# Altium PCB SON_versept2017.PcbDoc
Units mil, origin at the board's own origin, x right, y up, seen from the top; angles counter-clockwise.
Board outline 6000 x 4000 mil, 2 copper layers (Top Layer, Bottom Layer); 46 components, 25 nets, 140 pads, 33 vias.
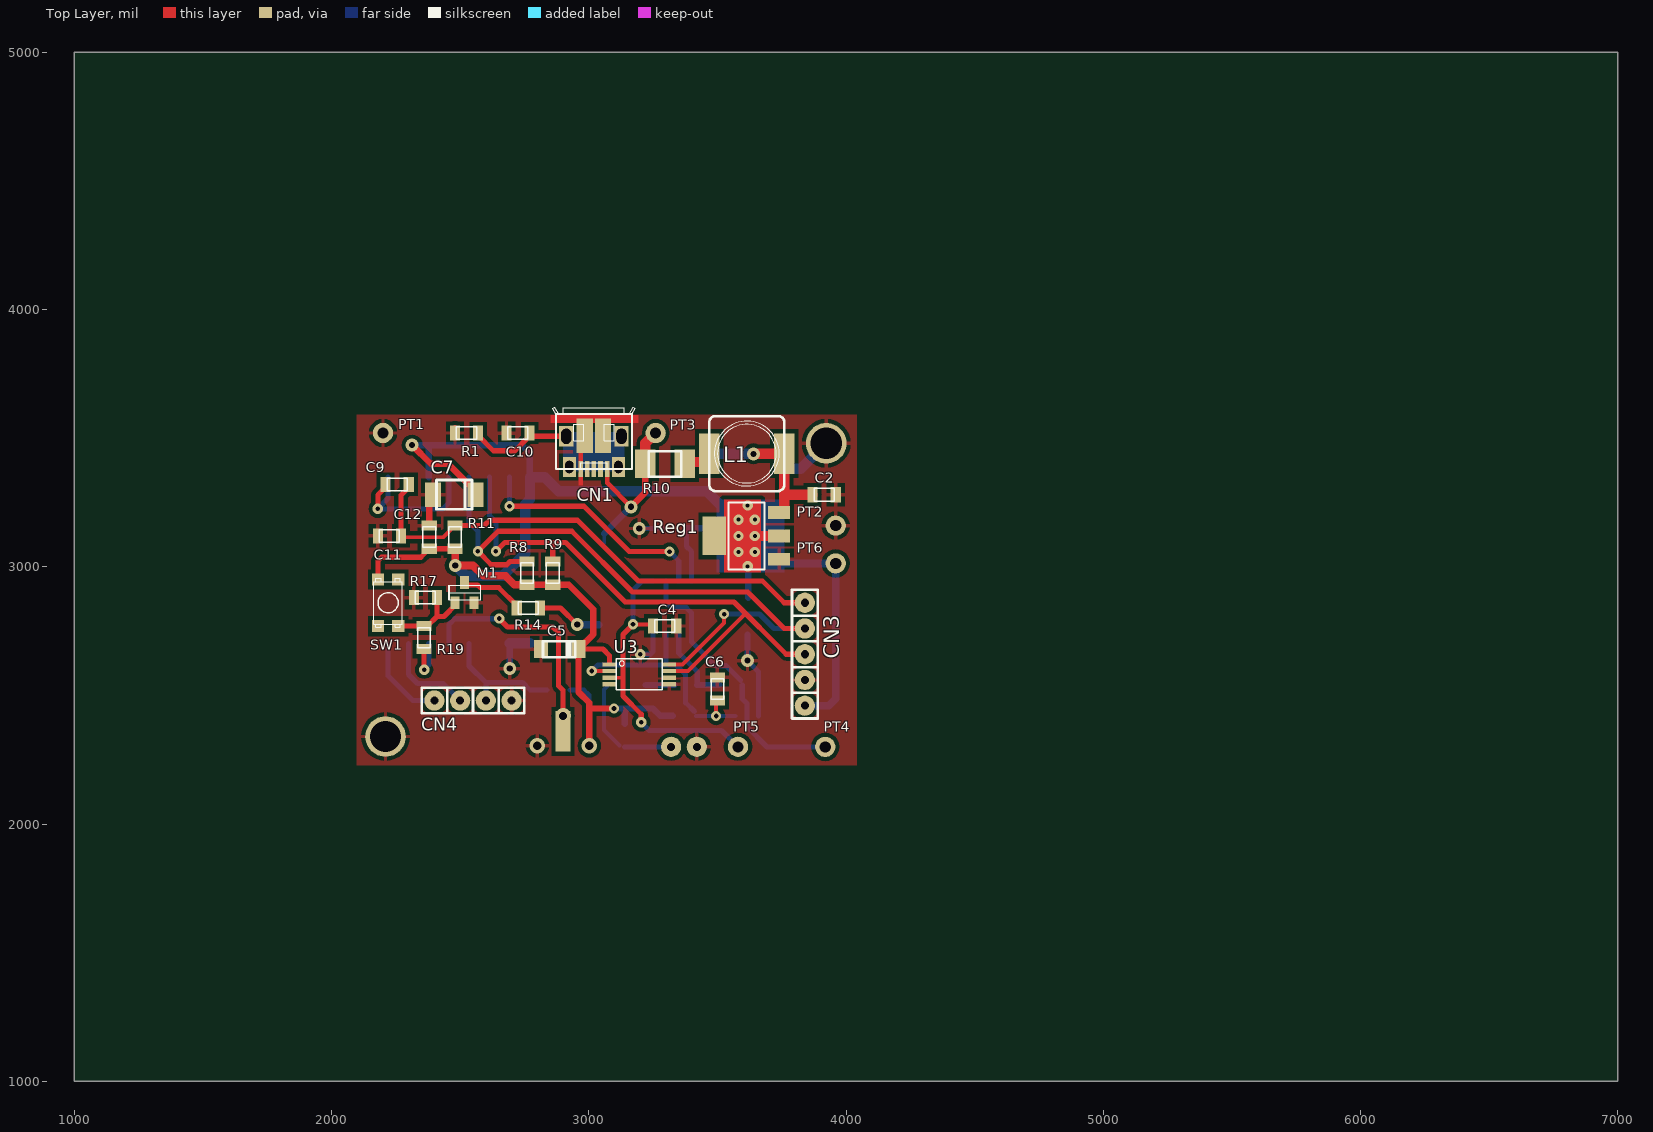
[diagram p0: Top Layer view]
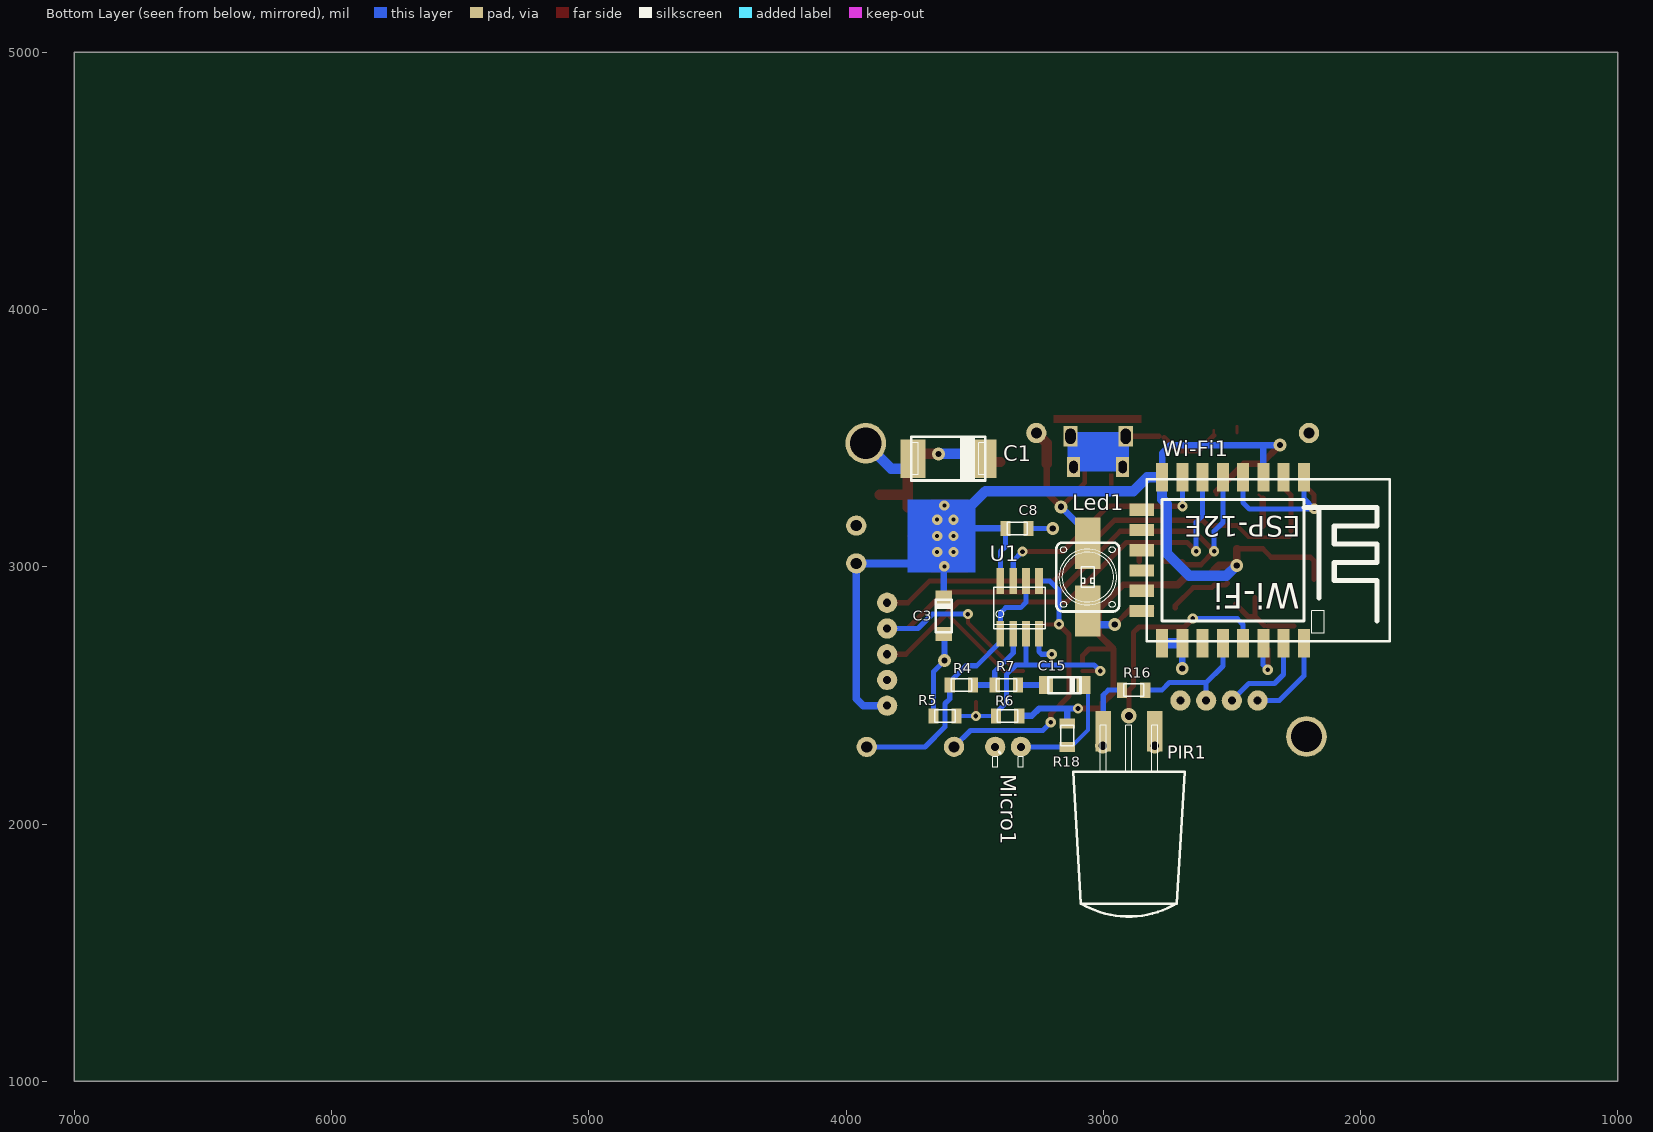
[diagram p1: Bottom Layer view, seen from below]

## Layer stack, top to bottom
Top Layer: signal copper 1.4
Dielectric: dielectric 12.6, FR-4, Dk 4.8
Bottom Layer: signal copper 1.4

## Board outline
1000,1000 7000,1000 7000,5000 1000,5000

## Design rules (kind name [scope] priority, off if disabled: settings)
AssemblyTestPointUsage [All] p1 off:
AssemblyTestpoint [All] p1 off: testpointundercomponent=TRUE minsize=40 maxsize=100 preferedsize=60 minholesize=0 maxholesize=40 preferedholesize=32 testpointgrid=1 usegrid=TRUE gridtolerance=0.01 allowsidetop=TRUE allowsidebottom=TRUE
Clearance [All] p1 off: gap=8
ComponentClearance [All] p1 off: gap=10 collisioncheckmode=3 verticalgap=10 showdistances=FALSE
DiffPairsRouting [All] p1 off: maxlimit=10 minlimit=10 mostfreqgap=10 maxuncoupledlength=500
FabricationTestPointUsage [All] p1 off: valid=0 allowmultiple=FALSE
FabricationTestpoint [All] p1 off: side=3 testpointundercomponent=TRUE minsize=40 maxsize=100 preferedsize=60 minholesize=0 maxholesize=40 preferedholesize=32 testpointgrid=1 allowsidetop=TRUE allowsidebottom=TRUE usegrid=TRUE gridtolerance=0.01
FanoutControl Fanout_BGA [IsBGA] p1 off: bgadir=Out bgaviamode=Centered fanoutstyle=Auto fanoutdirection=Alternating viagrid=1 // Fanout_BGA (Default Rule)
FanoutControl Fanout_LCC [IsLCC] p2 off: bgadir=Out bgaviamode=Centered fanoutstyle=Auto fanoutdirection=Alternating viagrid=1 // Fanout_LCC (Default Rule)
FanoutControl Fanout_SOIC [IsSOIC] p3 off: bgadir=Out bgaviamode=Centered fanoutstyle=Auto fanoutdirection=Alternating viagrid=1 // Fanout_SOIC (Default Rule)
FanoutControl Fanout_Small [(CompPinCount < 5)] p4 off: bgadir=Out bgaviamode=Centered fanoutstyle=Auto fanoutdirection=OutThenIn viagrid=1 // Fanout_Small (Default Rule)
FanoutControl Fanout_Default [All] p5 off: bgadir=Out bgaviamode=Centered fanoutstyle=Auto fanoutdirection=Alternating viagrid=1 // Fanout_Default (Default Rule)
Height [All] p1 off: minheight=0 maxheight=1000 prefheight=500
HoleSize [All] p1 off: absolutevalues=TRUE maxlimit=100 minlimit=1 maxpercent=80.000 minpercent=20.000
HoleToHoleClearance [All] p1 off: gap=10 allowstackedmicrovias=TRUE
PolygonConnect [All] p1: connectstyle=Relief reliefconductorwidth=15 reliefentries=4 polygonreliefangle="90 Angle"
RoomDefinition SON_versept2017 [InComponentClass('SON_versept2017')] p1: confinementstyle=ConfineIn formatcopy=TRUE lockcomponents=FALSE outline 1836,1593 4056,1593 4056,3663 1836,3663
RoutingVias [All] p1: holewidth=28 width=50 viastyle="Through Hole" minholewidth=28 minwidth=50 maxholewidth=28 maxwidth=50
SilkscreenOverComponentPads [All] p1: minsilkscreentomaskgap=10
SolderMaskExpansion [All] p1: expansion=4
Width [All] p1: maxlimit=80 minlimit=10 preferedwidth=10
13 further rules are at their usual default settings.

## Components (designator, comment, footprint, x,y, rotation, side; value= is the part's Value field where it differs from the comment)
C1 "220µF/16V" 7343-31 3720,3420 r180 bottom
C2 "100n" 0805 3960,3280 r180 top
C3 "10µF/16V" "Tantale 10µF/16V" 3620,2880 r90 bottom
C4 "100n" 0805 3340,2770 r180 top
C5 "10µF/6V3 tantale" "Tantale 10µF/6V3" 2960,2680 r180 top
C6 "10n" 0805 3500,2480 r90 top
C7 "47µF/10V tantale" "tantale 47µF/10V" 2560,3280 r180 top
C8 "100n" 0805 3290,3149 r0 bottom
C9 "100n" 0805 2300,3320 r180 top
C10 "100 n" 0805 2680,3520 r0 top
C11 "100n" 0805 2180,3120 r0 top
C12 "100n" 0805 2380,3160 r270 top
C15 "1µF/16V" 3216-18 3076.68,2540.32 r0 bottom
CN1 "USB Micro B" "USB Micro 714-2347" 3020,3380 r180 top
CN3 "inch_ligne 1x5" INCH_1x5_droit 3840,2460 r90 top
CN4 "inch_ligne 1x4" INCH_1x4_droit 2400,2480 r0 top
L1 "100µH CD74R series" "SELF CD74R" 3760,3440 r0 top
Led1 "LTW5AM" LTW5AM 3060,2960 r270 bottom
M1 "NTR4501N" "SOT23 (NTR4501)" 2480,2860 r0 top
Micro1 "Electret" "Micro_electret simple" 3320,2300 r180 bottom
PIR1 "PIR_WL" PIR_WL 3000,2360 r180 bottom
PT1 "GND" "PTEST boucle"#1 2200,3520 r0 top
PT2 "GND" "PTEST boucle"#1 3960,3160 r0 top
PT3 "+5V" "PTEST boucle"#1 3260,3520 r0 top
PT4 "Son" "PTEST boucle"#2 3920,2300 r0 top
PT5 "Seuil" "PTEST boucle"#1 3580,2300 r0 top
PT6 "+3V3" "PTEST boucle"#3 3960,3020 r0 top
R1 "100K" 0805 2480,3520 r0 top
R4 "100K" 0805 3506.68,2540.32 r0 bottom
R5 "10K" 0805 3660,2420 r180 bottom
R6 "10K" 0805 3416.68,2420.32 r180 bottom
R7 "1K" 0805 3331.68,2540.32 r0 bottom
R8 "10K" 0805 2760,3020 r270 top
R9 "10K" 0805 2860,3020 r270 top
R10 "0R33" 1210 3220,3400 r0 top
R11 "4K7" 0805 2480,3160 r270 top
R14 "68" 0805 2720,2840 r0 top
R16 "10K" 0805 2836.68,2520.32 r0 bottom
R17 "15K" 0805 2320,2880 r0 top
R18 "2K" 0805 3140,2300 r90 bottom
R19 "470" 0805 2360,2680 r90 top
Reg1 "LM1117/33" "SOT-223 thermo1" 3740,3120 r90 top
SW1 "KMR 4" "µSwitch KMR4" 2220,2860 r90 top
U1 "AD8052" SOIC08 3400,2740 r90 bottom
U3 "MCP47FEB21" TSSOP_8 3080,2620 r0 top
Wi-Fi1 "ESP-12E" ESP-12E 2220,3340 r270 bottom

## Footprints (in the part's own frame and the unit in brackets; to place one, negate y for a bottom-side part, rotate by r counter-clockwise, add the part's x,y. Pads: shape width x height; smd on the part's side, far side on the other; paste and mask are expansions set on the pad)
0805 [mm] "résistance CMS"
  rect 1x1.5 smd: 1(0,0) 2(2.286,0)
  silkscreen extent 0.13,-0.63 2.13,0.63
1210 [mm] "résistance CMS 0,5W ERJ14B"
  rect 2x2.8 smd: 1(0,0) 2(3.9,0)
  silkscreen extent 0.33,-1.26 3.53,1.24
3216-18 [mm] "condensateur tantale CMS (3,2 x 1,6 x 1,6)"
  rect 1.4x1.8 smd: 1(0,0) 2(3.7,0)
  silkscreen extent 0.3,-0.79 3.5,0.81
7343-31 [mm] "condensateur tantale CMS (7,3 x 4,3 x 3,0)"
  rect 2.5x3.8 smd: 1(6.5,0) 2(-0.5,0)
  silkscreen extent -0.65,-2.15 6.65,2.15
ESP-12E [mm] "module Wi-Fi"
  rect 2.8x1.2 smd: 1(-0.2,0) 2(-0.2,-2) 3(-0.2,-4) 4(-0.2,-6) 5(-0.2,-8) 6(-0.2,-10) 7(-0.2,-12) 8(-0.2,-14) 15(16.2,-14) 16(16.2,-12) 17(16.2,-10) 18(16.2,-8) 19(16.2,-6) 20(16.2,-4) 21(16.2,-2) 22(16.2,0)
  rect 1.2x2.4 smd: 9(3,-16) 10(5,-16) 11(7,-16) 12(9,-16) 13(11,-16) 14(13,-16)
  silkscreen extent 0,-15.5 16,8.5
INCH_1x4_droit [mm] "simple rangée 2,54 mm"
  round 2 hole 0.8: 1(0,0) 2(2.54,0) 3(5.08,0) 4(7.62,0)
  silkscreen extent -1.27,-1.27 8.89,1.27
INCH_1x5_droit [mm] "simple rangée 2,54 mm"
  round 2 hole 0.8: 1(0,0) 2(2.54,0) 3(5.08,0) 4(7.62,0) 5(10.16,0)
  silkscreen extent -1.27,-1.27 11.43,1.27
LTW5AM [mil] "LED golden dragon"
  rect 200x100 smd: 1(-132,0) 2(132,0)
  silkscreen extent -134,-122 134,122
"Micro_electret simple" [mm] "Microphone coudé sur PCB sans sérigraphie"
  round 2 hole 0.8: 0(-2.54,0) 1(0,0)
  silkscreen extent -2.79,-2 0.25,-0.51
PIR_WL [mm] "détecteur infrarouge"
  rect 1.5x4 smd: 1(0,0) 3(5.08,0)
  rect 1.5x4 smd far side: 2(2.54,0)
  silkscreen extent -2.96,-18.28 8.04,0.6
"PTEST boucle"#1 [mm] "RS 262-2179"
  round 2 hole 1.1: 1(0,0)
"PTEST boucle"#2 [mm] "RS 262-2179"
  round 2 hole 1.1: 1(-0.017,-0.008)
"PTEST boucle"#3 [mm] "RS 262-2179"
  round 2 hole 1.1: 1(0,-0.178)
"SELF CD74R" [mm] "Self 7,4 x 7,4"
  rect 2x4 smd: 1(0,0) 2(-7.4,0)
  silkscreen extent -7.4,-3.7 0,3.7
SOIC08 [mil]
  rect 100x30 smd: 1(0,0) 2(0,-50) 3(0,-100) 4(0,-150) 5(205,-150) 6(205,-100) 7(205,-50) 8(205,0)
  silkscreen extent 20,-175 181,25
"SOT23 (NTR4501)" [mil] "D->1 G->2 S->3"
  rect 35x50 smd: 1(37.4,78.74) 2(0,0) 3(74.8,0)
  silkscreen extent -25,12 100,68
"SOT-223 thermo1" [mm] "empreinte pour SOT-223"
  rect 1.27x2.15 smd: 1(-2.3,0) 2(0,0) 3(2.3,0)
  rect 3.81x2.286 smd: 2(0,6.4)
  Top Layer region: -3.6,1.8 3.6,1.8 3.6,5.461 -3.6,5.461
  Bottom Layer region: -3.602,-0.531 3.598,-0.531 3.598,6.175 -3.602,6.175
  silkscreen extent -3.3,1.45 3.3,5
"Tantale 10µF/6V3" [mm] "1206 ou 3216-18 (175-4041)"
  rect 1.4x1.8 smd: 1(0,0) 2(3.7,0)
  silkscreen extent 0.3,-0.79 3.5,0.81
"Tantale 10µF/16V" [mm] "1206 ou 3216-18 (145-7461)"
  rect 1.4x1.6 smd: 1(0,0) 2(-3.6,0)
  silkscreen extent -3.4,-0.82 -0.2,0.8
"tantale 47µF/10V" [mm] "1210 ou 3528-21 (175-4168)"
  rect 1.6x2.4 smd: 1(0,0) 2(4.2,0)
  silkscreen extent 0.36,-1.45 3.86,1.45
TSSOP_8 [mm]
  rect 1.4x0.42 smd: 1(0,0) 2(0,-0.65) 3(0,-1.3) 4(0,-1.95) 5(5.9,-1.95) 6(5.9,-1.3) 7(5.9,-0.65) 8(5.9,0)
  silkscreen extent 0.7,-2.51 5.2,0.58
"USB Micro 714-2347" [mm] "empreinte pour micro USB RS 714-2347"
  rect 0.45x1.6 smd: 1(-1.3,0) 2(-0.65,0) 3(0,0) 4(0.65,0) 5(1.3,0)
  rect 1.3x2 hole 0.8 slot 1.2 at 90 deg: 6(-2.425,-0.2) 7(2.425,-0.2)
  rect 1.4x2 hole 1 slot 1.5 at 90 deg: 8(-2.725,-3.23) 9(2.725,-3.23)
  rect 1.6x3.4 smd: 10(-0.9,-3.3) 11(0.9,-3.3)
  silkscreen extent -4.1,-6.12 4.1,0
"µSwitch KMR4" [mm] "µSwitch KMR 4"
  rect 1.2x1.2 smd: 1(-2.3,1) 2(2.3,1) 3(-2.3,-1) 4(2.3,-1)
  silkscreen extent -2.4,-1.4 2.4,1.4

## Part data
C1: library part "tantale 220µF/16V", "253-5290 case 7343-31"
C2 C4 C6 C8 C9 C10 C11 C12: library part Cap_CMS_0805, "CMS 0805"
C3: library part "tantale 10µF/16V", "145-7461 case 3216-18"
C5: library part "tantale 10µF/6V3", "175-4041 ou 145-7412 case 3216-18"
C7: library part "tantale 47µF/10V", "175-4168"
C15: library part "tantale 1µF/16V", "145-7406 case 3216-18"
CN1: "Amphenol 714-2347"
CN3: library part Inch_1x5_droit, "Inch_1x5_droit"
CN4: library part Inch_1x4_droit, "Inch_1x4_droit"
L1: library part "Self CD74R", "SMT CD74R Aliexpress"
Led1: library part "LTW5AM LED", "LED Golden Dragon Plus"
M1: "MOSFET canal N"
Micro1: library part Microphone_03, "Microphone électret"
PIR1: library part PIR_01, "Détecteur infrarouge"
PT1 PT2 PT3 PT4 PT5 PT6: library part "PTEST boucle", "pointe de test CI 262-2179"
R1 R4 R5 R6 R7 R8 R9 R11 R14 R16 R17 R18 R19: library part "Res CMS 0805", "CMS 0805"
R10: library part "Res CMS 1210 ERJ14B", "CMS 1210"
Reg1: library part LM1117MPX-3.3, "Régulateur SOT-223"
SW1: library part µSwitch, "KMR 4 Series 793-1605"
U1: "AOP"
U3: "DAC I2C (RS : 879-3261)"
Wi-Fi1: "ESP-12E module Wi-Fi"

## Free pads (board coordinates)
  round 158 hole 122: 1(2210,2340) 2(3923,3480)

## Via types
v1: diameter 40, hole 18, Top Layer to Bottom Layer, 14 vias
v2: diameter 50, hole 24, Top Layer to Bottom Layer, 8 vias
v3: diameter 39.37, hole 15.75, Top Layer to Bottom Layer, 8 vias
v4: diameter 60, hole 32, Top Layer to Bottom Layer, 3 vias

## Nets (pads, with @x,y where several pads share a name; then routed paths per layer and width w, separated by ;. In a path a pad name is that pad's centre, name@x,y a point inside that pad or via, vN(x,y) a via of type N, cw(c..) or ccw(c..) an arc to the next point about the centre after c; other vN are vias at no path point)
3V3: C3.1 C5.1 C7.1 C8.2 C12.2 CN3.1 PIR1.1 PT6.1 R6.2 R8.2 R9.2 R11.2 R16.2 R18.2 Reg1.2 SW1.2 U1.8 U3.1 Wi-Fi1.3 Wi-Fi1.8 | length 6335.9
  Top Layer w15: C7.1 C7.1@2560,3293
  Top Layer w20: SW1.2 2180.63,3023.63 2194,3037 2347,3037 C12.2 R11.2 ; C5.1 3055,2680 3080,2655 U3.1@3080,2625
  Top Layer w25: v2(2313,3473) 2386,3400 2453,3400 C7.1@2560,3293 ; R8.2 R9.2 2922,2930 3017,2835 3017,2737 C5.1 2960,2513 3002,2471 3002,2449 ; v4(3002,2304) 3002,2449 ; v1@3106,2449 3002,2449
  Top Layer w30: R11.2 2481,3069 v2(2481,3005) 2550,3005 2590,2965 2676,2965 2711,2930 R8.2
  Top Layer w40: 3645.51,3120 Reg1.2@3740,3120
  Bottom Layer w15: R6.2 R6.2@3326.68,2422.32
  Bottom Layer w20: R16.2 2980.68,2520.32 3000,2501 PIR1.1 ; C8.2 3380,3079 3400,3059 U1.8
  Bottom Layer w25: v2(2313,3473) 2739,3473 2771.18,3440.82 Wi-Fi1.8 ; Wi-Fi1.3 2377.48,3465.48 ; v1@3106,2449 3249,2449 3277.68,2420.32 R6.2 ; R18.2 3140,2448 ; C8.2@3378,3149 3510,3149 ; C3.1 3620,3021
  Bottom Layer w30: 3737,3013 PT6.1 3960,2487 3933,2460 CN3.1
  Bottom Layer w40: v2(2481,3005) 2521,2965 2666,2965 2753,3052 2753,3244 2771.18,3262.18 Wi-Fi1.8 2829.13,3347.87 2883,3294 3458,3294 3534,3218
  other v1: 3098,2449
+5V: CN1.1 Led1.1 PT3.1 R10.1 | length 696.3
  Top Layer w18: CN1.1 3071.18,3325.82 v2(3164,3233)
  Top Layer w25: v2(3164,3233) 3220,3289 R10.1
  Top Layer w40: R10.1 3220,3480 PT3.1
  Bottom Layer w15: Led1.1 Led1.1@3060,3129
  Bottom Layer w25: Led1.1@3060,3129 v2(3164,3233)
EARTH: C10.2 CN1.6 CN1.7 CN1.8 CN1.9 R1.2 | length 1026.6
  Top Layer w10: R1.2@2570,3510 R1.2 R1.2@2570,3530
  Top Layer w20: R1.2@2570,3510 2629,3451 2713,3451 C10.2@2764,3502 ; C10.2@2782.83,3507.17 CN1.9
  Bottom Layer w10: CN1.7@2912.72,3399.69 CN1.7
  Bottom Layer w25: CN1.7@2912.72,3399.69 CN1.9 ; CN1.6@3127.28,3399.69 CN1.8
  Bottom Layer w35: CN1.9 CN1.8 ; CN1.7 CN1.6
GND: C1.2 C2.1 C3.2 C4.1 C5.2 C6.2 C7.2 C8.1 C10.1 C11.1 C12.1 CN1.5 CN1.10 CN1.11 CN3.2 CN4.4 M1.3 Micro1.0 pad.1 pad.2 PIR1.3 PT1.1 PT2.1 R1.1 R5.1 R17.1 Reg1.1 U1.4 U3.5 U3.6 Wi-Fi1.15 Wi-Fi1.16 | length 1184.2
  Top Layer w10: C7.2@2380,3265.35 C7.2 ; R1.1 R1.1@2480,3546
  Top Layer w18: CN1.5 CN1.11@2968.82,3494.17
  Top Layer w25: C12.1 C7.2@2380,3265.35
  Bottom Layer w10: C3.2@3617,2735.27 C3.2
  Bottom Layer w20: Wi-Fi1.16 Wi-Fi1.16@2693,2701.65 ; v2(3196,3149) C8.1 ; v1(3200,2660) 3240,2660 3250,2670 U1.4 ; v2(3617,2635) 3660,2592 R5.1
  Bottom Layer w25: v2(2693,2604) Wi-Fi1.16@2693,2701.65 ; v2(3617,2635) C3.2@3617,2735.27
  Bottom Layer w40: Wi-Fi1.16 Wi-Fi1.15 ; C1.2@3778.68,3381 3824,3381 pad.2
  other v4: 2800,2304
INT: C9.1 C11.2 CN3.5 R11.1 | length 1914.2
  Top Layer w15: C11.2@2275,3115 2435,3115 R11.1
  Top Layer w20: C11.2@2270,3140 2270,3278 C9.1@2306,3314 ; R11.1 2593,3160 2614,3181 2956,3181 3193,2944 3676,2944 3760,2860 CN3.5
NetC1_1: C1.1 C2.2 L1.1 Reg1.3 | length 652.5
  Top Layer w10: L1.1 L1.1@3762.09,3437.91
  Top Layer w40: v2(3640,3439) L1.1@3759,3439 ; L1.1@3740,3420 L1.1@3759,3439 ; Reg1.3@3760,3230.55 L1.1 L1.1@3759,3439 ; 3761,3280 C2.2
  Bottom Layer w40: C1.1 3483.09,3439 v2(3640,3439)
NetC4_2: C4.2 PT5.1 U1.5 U3.3 | length 1193.7
  Top Layer w15: U3.3 3132.18,2568.82 ; v1(3172,2776) C4.2@3244,2776
  Top Layer w20: v1(3172,2776) 3133,2737 3133,2498 3204,2427 v1(3204,2395) v1@3204,2396.74
  Bottom Layer w20: v1(3172,2776) 3172,2909 3208,2945 U1.5 ; v1(3204,2395) 3235,2364 3516,2364 PT5.1
NetC6_1: C6.1 R5.2 R6.1 U1.3 U3.2 | length 944.3
  Top Layer w15: v1@3012.59,2594.41 U3.2 ; v1(3495,2420) C6.1@3495,2475
  Bottom Layer w15: R6.1@3417,2420 v1(3495,2420) R5.2
  Bottom Layer w20: v1(3012,2595) 3035.32,2618.32 3338.68,2618.32 3376.68,2580.32 3376.68,2471.32 R6.1@3410.68,2437.32 ; 3300,2618.32 U1.3
NetC9_2: C9.2 Wi-Fi1.1 Wi-Fi1.4 | length 616.5
  Top Layer w20: v1(2180,3225) 2180,3279 C9.2@2207,3306
  Bottom Layer w20: Wi-Fi1.1 2220,3265 v1(2180,3225) 2432,3225 2456.22,3249.22 Wi-Fi1.4
NetC15_1: C15.1 Micro1.1 R18.1 | length 447.5
  Bottom Layer w15: C15.1 3059,2522.64 3059,2365 R18.1@3119,2305
  Bottom Layer w20: R18.1 Micro1.1
NetC15_2: C15.2 R7.1 | length 109.3
  Bottom Layer w25: C15.2 R7.1
NetCN4_1: CN4.1 Wi-Fi1.22 | length 346
  Bottom Layer w20: Wi-Fi1.22 2220,2576 2316,2480 CN4.1
NetCN4_2: CN4.2 Wi-Fi1.21 | length 364.1
  Bottom Layer w20: Wi-Fi1.21 2298.74,2581.26 2334,2546 2434,2546 CN4.2
NetCN4_3: CN4.3 R16.1 Wi-Fi1.18 | length 498.1
  Bottom Layer w20: Wi-Fi1.18 2534.96,2614.04 2600,2549 CN4.3 ; 2600,2550 2743,2550 2772.68,2520.32 R16.1
NetL1_2: L1.2 R10.2 | length 41.5
  Top Layer w40: R10.2@3400.54,3407 L1.2@3442,3407
NetLed1_2: Led1.2 R14.2 | length 255.9
  Top Layer w20: R14.2 2890,2840 v2(2955,2775)
  Bottom Layer w30: v2(2955,2775) Led1.2@3039,2775
NetM1_1: M1.1 R14.1 | length 247
  Top Layer w20: M1.1@2518,2936 2525,2929 2568,2929 2578.26,2918.74 2650.26,2918.74 2720,2849 R14.1
NetM1_2: M1.2 R17.2 R19.2 SW1.3 | length 319.7
  Top Layer w20: SW1.3 2359.45,2769.45 R19.2 ; R19.2@2374,2771 2410,2807 ; R17.2 2410,2807 ; M1.2@2485,2855 2437,2807 2410,2807
NetPIR1_2: PIR1.2 Wi-Fi1.19 | length 863.2
  Top Layer w20: v1@2652,2798 v1(2652,2799) ; v1@2653,2797 2684,2766 2861,2766 2883,2744 2883,2537 2900,2520 v4(2900,2420)
  Bottom Layer w20: Wi-Fi1.19 2456.22,2775.22 2479,2798 2652,2798 v1(2652,2799)
NetPT4_1: PT4.1 R4.2 U1.1 U1.6 | length 1083.4
  Bottom Layer w20: U1.6 3300,2862 3321,2841 3379,2841 3400,2820 U1.1 3400,2707 3492,2615 3534,2615 R4.2@3590,2559 ; R4.2@3596.68,2528.32 R4.2 3596.68,2486.32 3615,2468 3615,2378 3693.32,2299.68 PT4.1
NetR4_1: R4.1 R7.2 U1.2 | length 314.4
  Bottom Layer w20: U1.2 3350,2665 3421.68,2593.32 R7.2
  Bottom Layer w25: R7.2 R4.1
NetR19_1: R19.1 Wi-Fi1.20 | length 190.7
  Top Layer w20: v1(2360,2600) R19.1
  Bottom Layer w20: v1(2360,2600) 2379,2619 2379,2700.68 Wi-Fi1.20
NetU1_7: U1.7 Wi-Fi1.7 | length 936.9
  Top Layer w20: v1(2692,3235) 2981,3235 3157,3059 v1(3314,3059)
  Bottom Layer w20: v1(2692,3235) 2692,3347.43 Wi-Fi1.7 ; v1(3314,3059) 3350,3023 U1.7
SCL: CN3.3 R9.1 U3.7 Wi-Fi1.6 | length 2159.4
  Top Layer w15: U3.7 3386.41,2594.41 3610,2818
  Top Layer w20: v1(2639,3060) 2674,3095 2860,3095 ; R9.1 2860,3095 ; CN3.3 3768,2660 3565,2863 3142,2863 2910,3095 2860,3095
  Bottom Layer w20: Wi-Fi1.6 2613.7,3198.3 2639,3173 v1(2639,3060)
SDA: CN3.4 R8.1 U3.8 Wi-Fi1.5 | length 2631
  Top Layer w15: U3.8 3365,2620 3526,2781 v1(3526,2816)
  Top Layer w20: R8.1 2694,3020 2682,3008 2621,3008 v1(2569,3060) 2647,3138 2934,3138 3170,2902 3618,2902 3760,2760 CN3.4
  Bottom Layer w20: Wi-Fi1.5 2534.96,3172.04 2569,3138 v1@2569,3061 ; v1(3526,2816) 3664,2816 3720,2760 CN3.4
pads on no net: CN1.2 CN1.3 CN1.4 SW1.1 SW1.4 U3.4 Wi-Fi1.2 Wi-Fi1.9 Wi-Fi1.10 Wi-Fi1.11 Wi-Fi1.12 Wi-Fi1.13 Wi-Fi1.14 Wi-Fi1.17
copper on no net:
  other v3: 3617.95,3001.89 3582.52,3057.01 3645.51,3057.01 3582.52,3120 3645.51,3120 3582.52,3182.99 3645.51,3182.99 3617.95,3238.11

## Polygon pours and split planes (outlines as drawn)
GND on Top Layer "Bottom Layer-No Net" (solid, pour order 1000): 2099,3591 4041,3591 4041,2229 2099,2229 2099,3591

## Other copper
Top Layer:
  rectangle net GND: 2851,3558 3193,3590
  rectangle net GND: 2961,3315 2977,3363
Bottom Layer:
  rectangle net EARTH: 2912.72,3387.87 3115.47,3507.17

## Silkscreen, mask and mechanical layers (free items; w line width, h text height)
Mechanical 1:
  lines w10: 2100,2230 2100,3590 4040,3590 4040,2230 2100,2230

## Text inside footprints (layer, text, board x,y; h text height)
Wi-Fi1: Bottom Overlay "Wi-Fi" at 2237,2936 h100 r180